# EAGLE board eagle_dibs_1 (EAGLE 9.5.2)

Size 100 x 80 mm. Coordinates in mm from the lower left corner, seen from the top.
Outline: 0,0 100,0 100,80 0,80 0,0
Copper layers (1*16): Top 0.035mm / dielectric 1.5mm / Bottom 0.035mm
Design rules "default": minimum track width 6mil, minimum drill 0.35mm, track to track 6mil, track to pad 6mil, pad to pad 6mil, via to via 6mil, smd to smd 6mil, copper to edge 40mil, drill to drill 6mil, minimum pad ring 10mil, minimum via ring 8mil, stop-mask expansion 4mil, vias tented up to drill 0mil, thermal gap 10mil

## Footprints (pad centres in the part's own frame; a part is rotated, then mirrored left to right if it is on the bottom)
LDR3MM = drill 0.8: P$1 0,0; P$2 2.54,0
LED3MM = drill 0.813 pad 1.676 octagon: A -1.27,0; K 1.27,0
0207/12 = drill 0.813 octagon: 1 -6.35,0; 2 6.35,0
SOCKET-08 = drill 0.813 long: 1 -3.81,-3.81; 2 -1.27,-3.81; 3 1.27,-3.81; 4 3.81,-3.81; 5 3.81,3.81; 6 1.27,3.81; 7 -1.27,3.81; 8 -3.81,3.81
CR2032-THRU = drill 2 pad 3.81 octagon: +1 -10.668,0; +2 10.668,0 | smd 10.16 x 10.16: - 0,0

## Placement (x,y rotation side)
LDR1  On: 555 Off: 855  [LDR3MM]  40.64,40.64 0 top
LED1  [LED3MM]  17.78,26.67 90 top
R1  12.5K  [0207/12]  58.42,58.42 90 top
R2  753  [0207/12]  48.26,58.42 90 top
R3  9.166K  [0207/12]  17.78,39.37 90 top
R4  1K  [0207/12]  25.4,5.08 0 top
R5  1K  [0207/12]  50.8,27.94 0 top
R6  300  [0207/12]  17.78,15.24 90 top
TLV1  Op amps  [SOCKET-08]  62.23,21.59 270 top
TLV2462  Op amps  [SOCKET-08]  62.23,43.18 270 top
U$1  CR2032  [CR2032-THRU]  22.86,64.77 180 top

## Library data of the parts
LDR1 = CEDTv40
LED1 U$1 = adafruit
R1-R6 = rcl; SPICEPREFIX: R
TLV1 TLV2462 = ic-package

## Nets
GND: LDR1.P$2 LED1.K R3.1 TLV1.3 TLV1.4 TLV2462.4 U$1.-
N$1: LDR1.P$1 R1.1 TLV2462.3
N$2: R2.1 R3.2 TLV2462.2
N$3: R1.2 R2.2 TLV1.8 TLV2462.8 U$1.+1 U$1.+2
N$4: LED1.A R6.2
N$5: R5.2 R6.1 TLV1.1
N$6: R4.2 R5.1 TLV1.2
N$7: R4.1 TLV2462.1

## Tracks (layer width: path | path; a pad name or v marks a point on that pad's centre or on a via)
GND  (6 unrouted)
N$1  (2 unrouted)
N$2  (2 unrouted)
N$3  (5 unrouted)
N$4  (1 unrouted)
N$5  (2 unrouted)
N$6  (2 unrouted)
N$7  (1 unrouted)